# Altium PCB reciever.PcbDoc
Units mm, origin at the board's own origin, x right, y up, seen from the top; angles counter-clockwise.
Board outline 152.4 x 101.6 mm, 2 copper layers (Top Layer, Bottom Layer); 24 components, 22 nets, 126 pads, 21 vias.
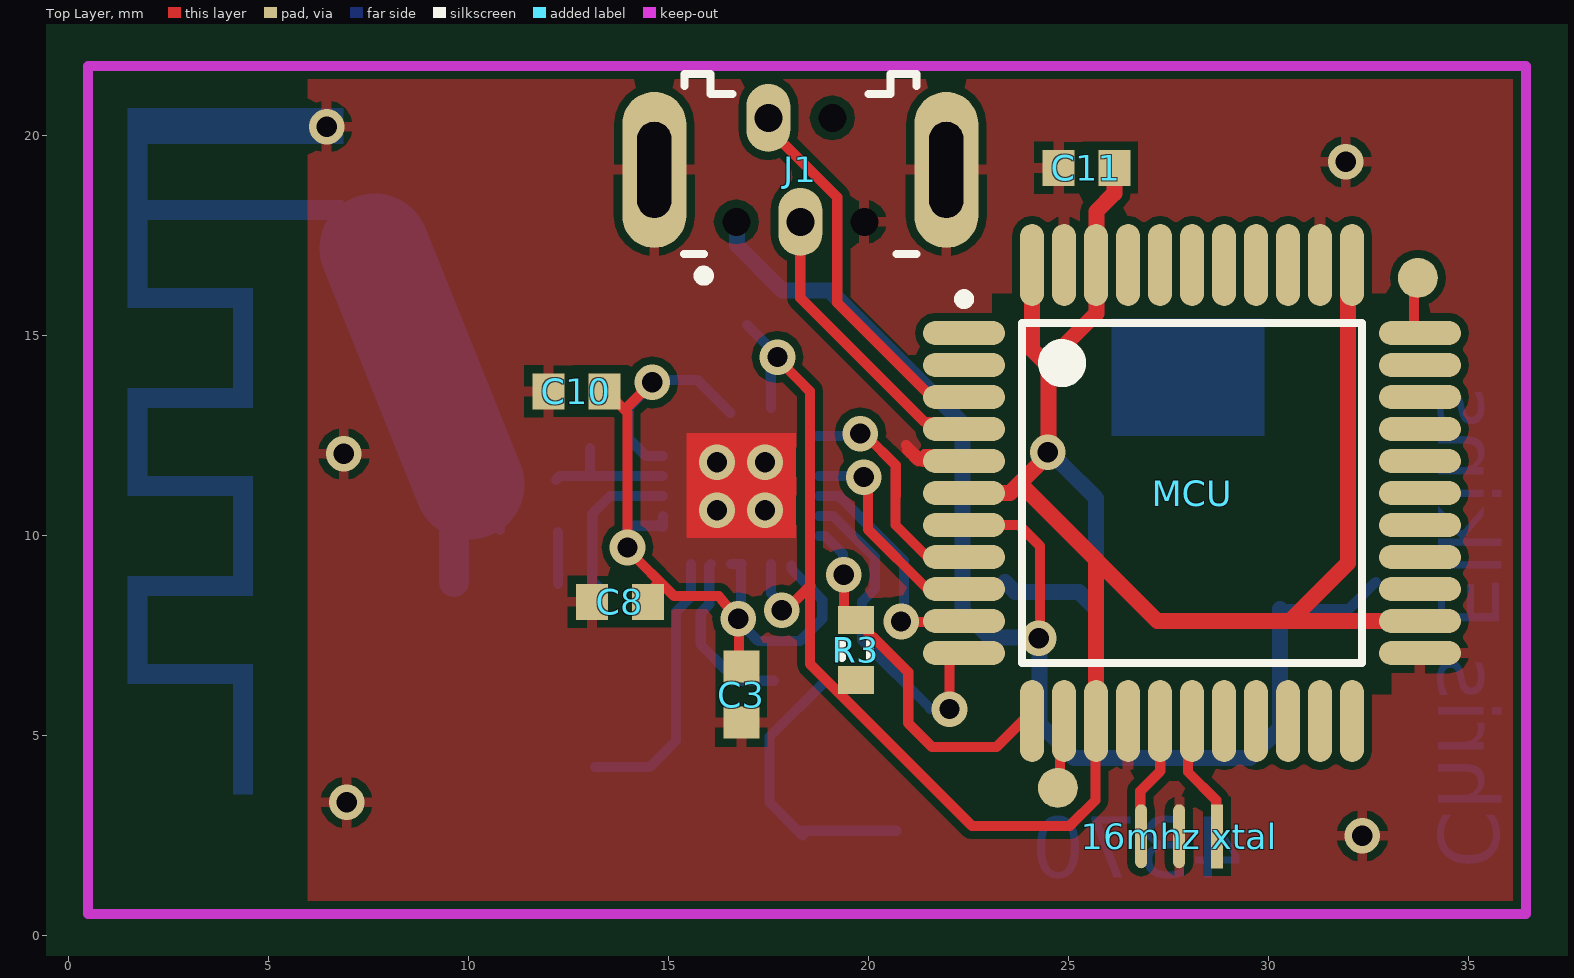
[diagram p0: Top Layer view]
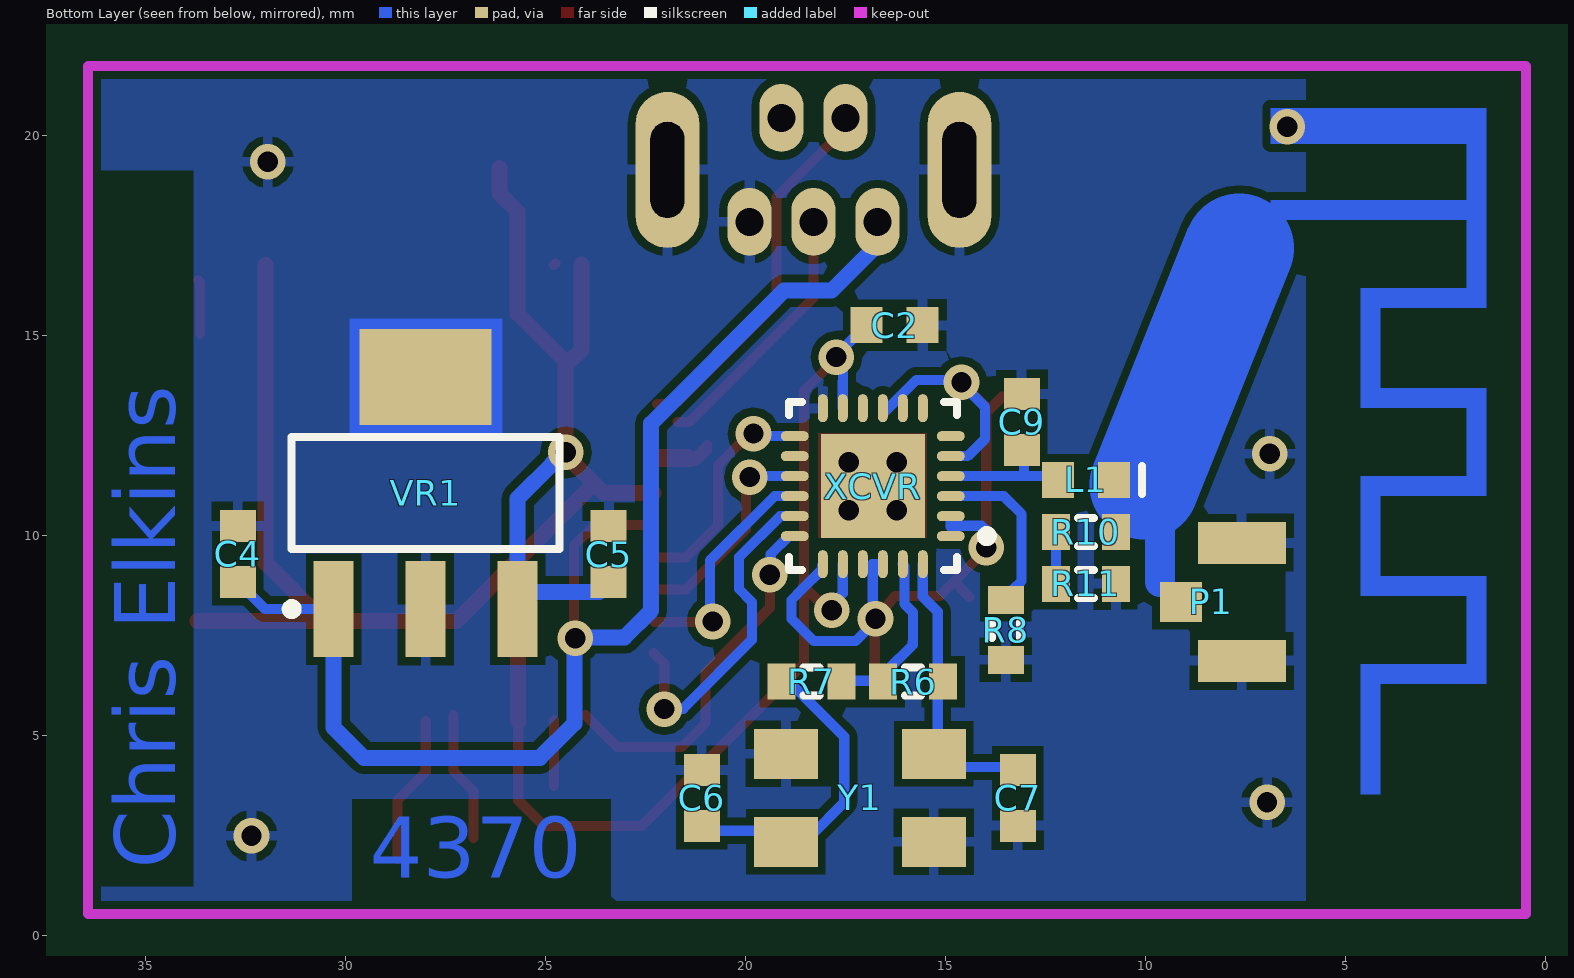
[diagram p1: Bottom Layer view, seen from below]

## Layer stack, top to bottom
Top Layer: signal copper 0.0356
Dielectric: dielectric 0.32, FR-4, Dk 4.8
Bottom Layer: signal copper 0.0356

## Board outline
-92.91,-21.97 59.49,-21.97 59.49,79.63 -92.91,79.63

## Design rules (kind name [scope] priority, off if disabled: settings)
Clearance [All] p1: gap=0.2
PolygonConnect [All] p1: connectstyle=Relief reliefconductorwidth=0.254 reliefentries=4 polygonreliefangle="90 Angle" airgapwidth=0.254
RoomDefinition U_xcvr [InComponentClass('U_xcvr')] p1: confinementstyle=ConfineOut formatcopy=TRUE lockcomponents=FALSE outline 59.62,30.38 145.959,30.38 145.959,38.09 59.62,38.09
RoomDefinition U_power [InComponentClass('U_power')] p2: confinementstyle=ConfineOut formatcopy=TRUE lockcomponents=FALSE outline 103.91,8.2 121.62,8.2 121.62,18.3 103.91,18.3
RoomDefinition U_mcu [InComponentClass('U_mcu')] p3: confinementstyle=ConfineOut formatcopy=TRUE lockcomponents=FALSE outline 103.7,-10.15 139.03,-10.15 139.03,7.16 103.7,7.16
RoomDefinition U_connectors [InComponentClass('U_connectors')] p4: confinementstyle=ConfineOut formatcopy=TRUE lockcomponents=FALSE outline 107.76,-24.22 113.42,-24.22 113.42,-12.31 107.76,-12.31
RoutingVias [All] p1: holewidth=0.711 width=1.27 viastyle="Through Hole" minholewidth=0.711 minwidth=1.27 maxholewidth=0.711 maxwidth=1.27
SilkToSolderMaskClearance SilkscreenOverComponentPads [IsPad] p1: minsilkscreentomaskgap=0.254 clearancetoexposedcopper=TRUE
SolderMaskExpansion [All] p1: expansion=0.102
Width [All] p1: maxlimit=5 minlimit=0.254 preferedwidth=0.254
27 further rules are at their usual default settings.

## Classes and differential pairs
component class U_xcvr: C2 C3 C6 C7 C8 C9 C10 E1 L1 P1 R3 R6 R7 R8 R10 R11 XCVR Y1
component class U_power: C4 C5 VR1
component class U_mcu: "16mhz xtal" C11 MCU
component class U_connectors: J1 ""

## Components (designator, comment, footprint, x,y, rotation, side; value= is the part's Value field where it differs from the comment)
"16mhz xtal" "NCSTCE16M0V53-R0" OSC 28.72,2.47 r180 top
C2 "Cap Semi" CAPC1608L 16.27,15.25 r0 bottom
C3 "Cap Semi" CAPC1608L 16.83,6.01 r90 top
C4 "Cap Semi" CAPC1608L 32.69,9.53 r270 bottom
C5 "Cap Semi" CAPC1608L 23.422,9.526 r270 bottom
C6 "Cap Semi" CAPC1608L 21.09,3.43 r270 bottom
C7 "Cap Semi" CAPC1608L 13.19,3.43 r90 bottom
C8 "Cap Semi" CAPC1608L 13.79,8.33 r0 top
C9 "Cap Semi" CAPC1608L 13.09,12.83 r90 bottom
C10 "Cap Semi" CAPC1608L 12.7,13.59 r180 top
C11 "Cap Semi" CAPC1608L 25.454,19.178 r180 top
J1 "5000750517" 5000750517 18.3,19.13 r0 top
L1 "Inductor" INDC1608L 11.49,11.38 r0 bottom
MCU "ATMega32u4" TQFP44_M 28.094,11.05 r0 top
P1 "u.fl" "U.FL connector" 7.59,8.33 r270 bottom
R3 "Res3" RESC1608L 19.69,7.13 r270 top
R6 "Res3" RESC1608L 15.812,6.338 r180 bottom
R7 "Res3" RESC1608L 18.352,6.338 r180 bottom
R8 "Res3" RESC1608L 13.49,7.63 r90 bottom
R10 "Res3" RESC1608L 11.49,10.08 r180 bottom
R11 "Res3" RESC1608L 11.49,8.78 r180 bottom
VR1 "NCP1117ST33T3G" SOT223-4N 27.994,11.05 r90 bottom
XCVR "CYRF8935" QFN50P400X400-24VAL 16.818,11.224 r0 bottom
Y1 "XTAL" PCBComponent_1 18.99,2.33 r180 bottom

## Footprints (in the part's own frame and the unit in brackets; to place one, negate y for a bottom-side part, rotate by r counter-clockwise, add the part's x,y. Pads: shape width x height; smd on the part's side, far side on the other; paste and mask are expansions set on the pad)
5000750517 [mm] "Connector; USB Mini-B, Type 2, Thru-Hole; 5 Position; Vertical"
  round 0.4 / inner round 0.4 / far side oval 1.1x1.7 hole 0.7: 1(-1.6,-1.3) 4(0.8,1.3) 5(1.6,-1.3)
  oval 1.1x1.7 / inner round 0.4 / far side oval 1.1x1.7 hole 0.7: 2(-0.8,1.3) 3(0,-1.3)
  oval 1.6x3.9 / inner oval 0.55x2.1 / far side oval 1.6x3.9 hole 0.85 slot 2.4 at 90 deg: 6(3.65,0) 7(-3.65,0)
  silkscreen extent -2.91,-2.77 2.91,2.4, body extent -3.85,-2.1 3.85,2.4, height 7.7
CAPC1608L [mm] "Chip Capacitor, Body 1.6x0.8mm, IPC High Density"
  rect 0.8x0.9 smd: 1(-0.7,0) 2(0.7,0)
  body extent -0.87,-0.48 0.87,0.48, height 1.3
INDC1608L [mm] "Chip Inductor, Body 1.6x0.8mm, IPC High Density"
  rect 0.8x0.9 smd: 1(-0.7,0) 2(0.7,0)
  silkscreen extent -1.4,-0.35 -1.4,0.35, body extent -0.87,-0.48 0.87,0.48, height 0.55
OSC [mm]
  rect 0.3x1.6 smd: 1(0,0)
  oval 0.3x1.6 smd: 2(0.95,0) 3(1.9,0)
PCBComponent_1 [mm]
  rect 1.6x1.25 smd: 1(0,0) 2(3.7,2.2) 3(0,2.2) 3(3.7,0)
QFN50P400X400-24VAL [mm] "24-Pin Plastic Quad Flat No-Lead 0.5 mm Pitch"
  oval 0.7x0.25 smd mask+0.09: 1(-1.95,1.25) 2(-1.95,0.75) 3(-1.95,0.25) 4(-1.95,-0.25) 5(-1.95,-0.75) 6(-1.95,-1.25) 13(1.95,-1.25) 14(1.95,-0.75) 15(1.95,-0.25) 16(1.95,0.25) 17(1.95,0.75) 18(1.95,1.25)
  oval 0.25x0.7 smd mask+0.09: 7(-1.25,-1.95) 8(-0.75,-1.95) 9(-0.25,-1.95) 10(0.25,-1.95) 11(0.75,-1.95) 12(1.25,-1.95) 19(1.25,1.95) 20(0.75,1.95) 21(0.25,1.95) 22(-0.25,1.95) 23(-0.75,1.95) 24(-1.25,1.95)
  rect 2.6x2.6 smd mask+0.09: 25(0,0)
  silkscreen extent -2.97,-2.1 2.1,2.1, body extent -2.07,-2.07 2.07,2.07, height 1
RESC1608L [mm] "Chip Resistor, Body 1.6x0.8mm, IPC High Density"
  rect 0.7x0.9 smd: 1(-0.75,0) 2(0.75,0)
  silkscreen extent -0.2,-0.35 0.2,0.35, body extent -0.85,-0.48 0.85,0.48, height 0.9
SOT223-4N [mm] "SOT223, 4-Leads, Body 6.5x3.5mm, Pitch 2.3mm, Lead Span 7mm, IPC Medium Density"
  rect 2.4x1 smd: 1(-2.9,2.3) 2(-2.9,0) 3(-2.9,-2.3)
  rect 2.4x3.3 smd: 4(2.9,0)
  silkscreen extent -3.02,-3.35 1.4,3.48, body extent -1.85,-3.35 1.85,3.35, height 1.7
TQFP44_M [mm] "Thin QFP, 44-Leads, Body 10x10mm, Pitch 0.8mm, IPC Low Density"
  oval 2.05x0.6 smd mask+0.09: 1(-5.7,4) 2(-5.7,3.2) 3(-5.7,2.4) 4(-5.7,1.6) 5(-5.7,0.8) 6(-5.7,0) 7(-5.7,-0.8) 8(-5.7,-1.6) 9(-5.7,-2.4) 10(-5.7,-3.2) 11(-5.7,-4) 23(5.7,-4) 24(5.7,-3.2) 25(5.7,-2.4) 26(5.7,-1.6) 27(5.7,-0.8) 28(5.7,0) 29(5.7,0.8) 30(5.7,1.6) 31(5.7,2.4) 32(5.7,3.2) 33(5.7,4)
  oval 0.6x2.05 smd mask+0.09: 12(-4,-5.7) 13(-3.2,-5.7) 14(-2.4,-5.7) 15(-1.6,-5.7) 16(-0.8,-5.7) 17(0,-5.7) 18(0.8,-5.7) 19(1.6,-5.7) 20(2.4,-5.7) 21(3.2,-5.7) 22(4,-5.7) 34(4,5.7) 35(3.2,5.7) 36(2.4,5.7) 37(1.6,5.7) 38(0.8,5.7) 39(0,5.7) 40(-0.8,5.7) 41(-1.6,5.7) 42(-2.4,5.7) 43(-3.2,5.7) 44(-4,5.7)
  silkscreen extent -5.82,-4.25 4.25,4.97, body extent -5,-5 5,5, height 1.6
"U.FL connector" [mm] "u.fl smd connector"
  rect 1x1.05 smd: 1(0,-1.525)
  rect 1.05x2.2 smd: 2(-1.475,0) 2(1.475,0)

## Part data
"16mhz xtal": "16MHz crystal oscillator with built in load capacatenceardf"
C2 C3 C4 C5 C6 C7 C8 C9 C10 C11: "Capacitor (Semiconductor SIM Model)"
J1: "USB On-The-Go (OTG) Mini-B Receptacle, Right Angle, Thru-Hole, 0.80mm (.031\") Pitch, Solder Tails & Shell Tabs with Dimples"
MCU: "usb enabled avr microcontroller"
P1: library part BNC, "BNC Elbow Connector"
R3 R6 R7 R8 R10 R11: "Resistor"
VR1: library part "Volt Reg", "Voltage Regulator"
Y1: "Crystal Oscillator"

## Free pads (board coordinates)
  round 1 smd: 1(24.74,3.68) 1(33.74,16.43)

## Via types
v1: diameter 0.889, hole 0.508, Top Layer to Bottom Layer, tented both sides, 17 vias
v2: diameter 0.889, hole 0.508, Top Layer to Bottom Layer, 4 vias

## Nets (pads, with @x,y where several pads share a name; then routed paths per layer and width w, separated by ;. In a path a pad name is that pad's centre, name@x,y a point inside that pad or via, vN(x,y) a via of type N, cw(c..) or ccw(c..) an arc to the next point about the centre after c; other vN are vias at no path point)
GND: "16mhz xtal.2" C2.1 C3.1 C4.1 C5.1 C6.1 C7.1 C8.1 C9.2 C10.2 C11.2 J1.5 J1.6 J1.7 MCU.5 MCU.15 MCU.23 MCU.35 MCU.43 P1.2 R8.1 R11.2 VR1.2 VR1.4 XCVR.12 XCVR.25 Y1.3 | length 4
  Top Layer w0.254: 20.95,12.25 21.37,11.83 MCU.5@22.23,11.83 ; 20.97,12.12 21.24,11.85 MCU.5@22.294,11.85 ; 21.409,12.023 22.121,12.023 MCU.5@22.294,11.85 ; MCU.5 MCU.5@22.294,11.85 ; MCU.43@24.754,16.79 MCU.43@24.794,16.75
  other v1: 32.35,2.48 6.96,3.32 6.89,12.03 31.94,19.33 6.46,20.21
  other v2: 16.218,10.624 17.418,10.624 16.218,11.824 17.418,11.824
"Net16mhz xtal_1": "16mhz xtal.1" MCU.17 | length 3.7
  Top Layer w0.254: MCU.17@27.994,5.35 27.994,4.076 28.7,3.37 28.7,1.906
"Net16mhz xtal_3": "16mhz xtal.3" MCU.16 | length 3.3
  Top Layer w0.254: 26.8,2.43 26.8,3.6 27.3,4.1 MCU.16@27.3,5.5
NetC6_2: C6.2 R7.1 Y1.1 | length 7.1
  Bottom Layer w0.254: 17.53,3.32 Y1.1@18.364,2.486 ; 17.53,3.33 17.53,4.957 R7.1@18.923,6.35 ; Y1.1@18.368,2.61 C6.2@20.7,2.61
NetC7_2: C7.2 R6.2 XCVR.24 Y1.2 | length 6.9
  Bottom Layer w0.254: C7.2@13.166,4.2 14.534,4.2 15.192,4.858 15.192,8.085 15.568,8.461 XCVR.24
NetC9_1: C9.1 L1.2 XCVR.4 | length 3.3
  Bottom Layer w0.254: L1.2 12.29,11.48 XCVR.4@14.862,11.48 ; 13.04,11.578 C9.1@13.04,12.18
NetE1_1: L1.1 P1.1 R10.2 | length 9.8
  Bottom Layer w0.254: R10.2@10.79,10.13 L1.1
  Bottom Layer w0.754: 9.64,8.83 9.64,11.03
  Bottom Layer w2.743: 7.658,17.169 10.03,11.26
NetJ1_2: J1.2 MCU.3 | length 9.4
  Top Layer w0.254: J1.2 17.5,20.17 19.223,18.447 19.223,15.809 21.701,13.331 21.91,13.331 21.964,13.277 MCU.3@22.208,13.277
NetJ1_3: J1.3 MCU.4 | length 6.6
  Top Layer w0.254: J1.3 18.3,15.932 21.409,12.823 MCU.4@21.7,12.823
NetMCU_8: MCU.8 XCVR.13 | length 5.9
  Top Layer w0.254: v1@19.925,12.465 19.966,12.465 20.686,11.745 20.686,10.984 20.68,10.978 20.68,10.252 21.492,9.44 22.284,9.44 MCU.8@22.294,9.45
  Bottom Layer w0.254: XCVR.13@18.73,12.48 19.94,12.48 19.831,12.539 v1(19.8,12.539)
NetMCU_9: MCU.9 XCVR.15 | length 5.4
  Top Layer w0.254: v1@19.99,11.38 19.99,10.142 21.492,8.64 22.284,8.64 MCU.9@22.294,8.65
  Bottom Layer w0.254: XCVR.15 19.896,11.474 v1@19.99,11.38
  other v1: 19.89,11.45
NetMCU_10: MCU.10 XCVR.16 | length 6.8
  Top Layer w0.254: v1(20.82,7.84) 20.82,7.97 20.798,7.992 20.732,7.992 20.732,7.82 20.88,7.82 20.89,7.83 MCU.10@22.274,7.83
  Bottom Layer w0.254: XCVR.16 19.274,10.974 20.89,9.358 20.89,7.83 20.88,7.82 20.732,7.82 20.732,7.992 20.798,7.992 20.82,7.97 v1(20.82,7.84)
NetMCU_11: MCU.11 XCVR.17 | length 8.8
  Top Layer w0.254: v1@21.87,5.75 22.03,5.68 22.03,6.786 MCU.11@22.294,7.05
  Bottom Layer w0.254: XCVR.17 19.132,10.474 20.161,9.445 20.161,8.65 19.84,8.329 19.84,7.38 21.555,5.665 21.55,5.66 v1@22.26,5.66
  other v1: 22.03,5.65
NetMCU_12: MCU.12 R3.1 XCVR.18 | length 9.3
  Top Layer w0.254: v1@19.39,8.94 19.39,8.18 R3.1 ; R3.1 20.5,7.068 21,6.57 21,5.3 21.6,4.7 23.2,4.7 MCU.12@24,5.5
  Bottom Layer w0.254: XCVR.18 18.922,9.974 19.37,9.526 19.37,8.95 19.39,8.97 v1(19.39,9.01)
NetR6_1: R6.1 R7.2 XCVR.23 | length 4.1
  Bottom Layer w0.254: XCVR.23 16.022,9.228 16.022,8.273 15.81,8.061 15.81,7.332 15.819,7.323 15.819,7.251 R6.1@16.44,6.63 ; R6.1@16.602,6.358 R7.2@17.642,6.358
NetR8_2: R8.2 XCVR.3 | length 3.9
  Bottom Layer w0.254: R8.2@13.32,8.63 13.1,8.85 13.1,10.53 13.544,10.974 XCVR.3
NetR10_1: R10.1 R11.1 | length 1.3
  Bottom Layer w0.254: R11.1 R10.1
NewNet1: MCU.13 pad.1@24.74,3.68 | length 1.7
  Top Layer w0.254: pad.1@24.79,3.73 MCU.13@24.79,5.38
NewNet2: MCU.33 pad.1@33.74,16.43 | length 1.4
  Top Layer w0.254: MCU.33@33.64,15.03 33.64,16.33 pad.1@33.69,16.38
VCC: C2.2 C5.2 C11.1 MCU.6 MCU.14 MCU.24 MCU.34 MCU.42 MCU.44 R3.2 VR1.3 XCVR.11 XCVR.20 | length 68.3
  Top Layer w0.254: v1@17.58,14.48 17.66,14.48 18.25,13.89 18.54,13.6 18.54,8.72 ; v1@17.81,7.99 18.54,8.72 ; 18.555,8.735 18.54,8.72 ; MCU.14@25.68,5.34 25.68,3.37 25.04,2.73 22.59,2.73 18.54,6.78 18.54,8.72
  Top Layer w0.4: MCU.6@22.294,11.05 23.54,11.05 24.24,11.75 24.56,12.1 24.66,11.96 v1@24.55,12.07 ; 23.795,11.285 25.72,9.36 ; MCU.44@24.094,16.77 24.094,14.636 24.44,14.29 ; v1@24.58,12 24.5,12.08 24.5,14.34 25.7,15.54 25.7,18.09 26.154,18.544 C11.1 ; MCU.14@25.68,5.34 25.69,5.35 25.69,9.39 27.23,7.85 30.54,7.85 ; MCU.34@31.994,16.75 31.994,9.304 30.54,7.85 ; MCU.24@33.694,7.85 30.54,7.85
  Bottom Layer w0.254: C2.2 v1@17.44,14.78 ; 17.56,13.85 v1@17.56,14.31 ; XCVR.20 17.57,9.272 17.57,8.54 17.89,8.22 v1@17.91,8.22 ; XCVR.11 17.568,13.842
  Bottom Layer w0.4: C5.2 23.668,8.58 25.264,8.58 VR1.3 25.694,10.916 24.82,11.79 v1@24.82,11.8
  other v1: 17.84,8.12 24.49,12.07 17.73,14.45
VDD: C3.2 C8.2 C10.1 XCVR.1 XCVR.2 XCVR.5 XCVR.8 XCVR.9 XCVR.19 XCVR.21 XCVR.22 | length 22.7
  Top Layer w0.254: C10.1@13.58,13.46 13.98,13.06 13.98,9.64 15.14,8.48 16.26,8.48 16.77,7.86 C3.2@16.77,6.7 ; 13.95,13.17 v1(14.6,13.82) ; C8.2@14.402,8.46 14.781,8.839
  Bottom Layer w0.254: 14.84,10.23 14.868,10.202 XCVR.2 ; XCVR.5 14.446,11.974 14.01,12.41 14.01,13.2 14.69,13.88 15.726,13.88 XCVR.9@16.558,13.048 ; XCVR.22 16.82,9.274 ; 16.82,9.28 16.82,9.274 ; 16.84,9.28 16.834,9.274 16.82,9.274 ; v1@16.9,7.81 16.82,7.89 16.82,9.274 ; v1@16.96,7.87 16.96,7.64 17.251,7.349 18.289,7.349 18.85,7.91 18.85,8.379 18.598,8.63 ; XCVR.19@18.08,9.24 18.08,9.15 18.598,8.632
  Bottom Layer w0.264: v1(13.98,9.69) 13.98,10.12 14,10.12 14.11,10.23 14.84,10.23
  other v1: 16.75,7.91
VUSB: C4.2 J1.1 MCU.7 VR1.1 | length 33.1
  Top Layer w0.254: MCU.7@22.294,10.25 MCU.7 23.77,10.25 24.29,9.73 v1@24.29,7.83
  Bottom Layer w0.254: VR1.1 32.01,8.15 C4.2
  Bottom Layer w0.4: J1.1@16.72,17.82 16.72,17.24 17.85,16.11 19.04,16.11 22.36,12.79 22.36,8.11 23.03,7.44 v1@23.9,7.44 ; v1@24.28,7.42 24.28,5.29 25.14,4.43 29.54,4.43 30.294,5.184 VR1.1
  other v1: 24.26,7.42
pads on no net: J1.4 MCU.1 MCU.2 MCU.18 MCU.19 MCU.20 MCU.21 MCU.22 MCU.25 MCU.26 MCU.27 MCU.28 MCU.29 MCU.30 MCU.31 MCU.32 MCU.36 MCU.37 MCU.38 MCU.39 MCU.40 MCU.41 XCVR.6 XCVR.7 XCVR.10 XCVR.14

## Polygon pours and split planes (outlines as drawn)
GND on Bottom Layer "Top Layer-No Net" (solid, remove dead copper, pour order 1001): 38.172,23.183 38.172,0.103 37.052,-1.017 36.992,-1.077 -1.078,-1.077 -1.078,22.563 -0.518,23.123
GND on Top Layer "Top Layer-No Net" (solid, remove dead copper, pour order 1000): 38.53,-1.16 36.99,0.38 36.99,22.9 0.49,22.9 -0.9,21.51 -0.02,20.63 -0.02,-0.33

## Keep-outs
Keep-Out Layer:
  lines w0.254: 0.49,0.53 0.49,21.73 36.44,21.73 36.44,0.53 0.49,0.53

## Other copper
Top Layer:
  rectangle net GND: 15.46,9.93 18.19,12.55
  pour cut-out: 23.09,16.05 33.11,16.05 33.13,16.03 33.09,15.99 33.09,6.01 23.13,6.01 23.09,6.05
Bottom Layer:
  rectangle net GND: 26.08,12.48 29.9,15.41
  region net NetE1_1: 4.12,6.5 4.12,3.52 4.62,3.52 4.62,6.5
  region net NetE1_1: 1.75,6.78 1.75,6.28 4.62,6.28 4.62,6.78
  region net NetE1_1: 1.77,18.38 1.77,17.88 6.88,17.88 6.88,18.38
  region net NetE1_1: 1.91,20.68 1.91,19.78 6.88,19.78 6.88,20.68
  region net NetE1_1: 1.48,20.68 1.48,15.68 1.98,15.68 1.98,20.68
  region net NetE1_1: 1.79,16.18 1.79,15.68 4.62,15.68 4.62,16.18
  region net NetE1_1: 4.12,15.95 4.12,13.45 4.62,13.45 4.62,15.95
  region net NetE1_1: 4.12,11.18 4.12,8.78 4.62,8.78 4.62,11.18
  region net NetE1_1: 1.83,8.98 1.83,8.48 4.62,8.48 4.62,8.98
  region net NetE1_1: 1.65,13.68 1.65,13.18 4.62,13.18 4.62,13.68
  region net NetE1_1: 1.76,11.48 1.76,10.98 4.62,10.98 4.62,11.48
  region net NetE1_1: 1.48,13.68 1.48,10.98 1.98,10.98 1.98,13.68
  region net NetE1_1: 1.48,8.98 1.48,6.28 1.98,6.28 1.98,8.98
  pour cut-out: 6.49,6.83 6.49,9.83 8.69,9.83 8.69,6.83
  text "Chris Elkins" at 34.25,1.66 h1.52 r270
  text "4370" at 29.39,1.43 h1.52
Multi-Layer:
  pour cut-out: 5.99,21.58 5.99,0.53 0.49,0.53 0.49,21.58

## Silkscreen, mask and mechanical layers (free items; w line width, h text height)
Top Overlay:
  circle w0.25: c15.88,16.485 r0.125
Top Solder:
  circle w0.254: c33.74,18.03 r0.05
  circle w0.254: c33.74,18.03 r0.25
  circle w0.254: c33.74,18.03 r0.5
  circle w0.254: c24.74,1.68 r0.05
  circle w0.254: c24.74,1.68 r0.255
  circle w0.254: c24.74,1.68 r0.5
  rectangle: 15.47,9.94 18.2,12.56
Bottom Solder:
  rectangle: 25.41,12.51 30.62,17.39
Mechanical 15:
  lines w0.1: 17.79,19.13 18.79,19.13 ; 18.29,18.63 18.29,19.63